# Altium PCB 388D_Control_v1_PCB1_harry.PcbDoc (part 2 of 5)
Units mil, origin at the board's own origin, x right, y up, seen from the top; angles counter-clockwise.
Board outline 4800 x 4000 mil, 6 copper layers (Top Layer, Singal Layer 2, Signal layer 3, Signal Layer 4, Signal Layer 5, Bottom Layer), stack 32.7 mil thick; 431 components, 469 nets, 2000 pads, 719 vias.
Unrouted connection lines stored in the file: 971.
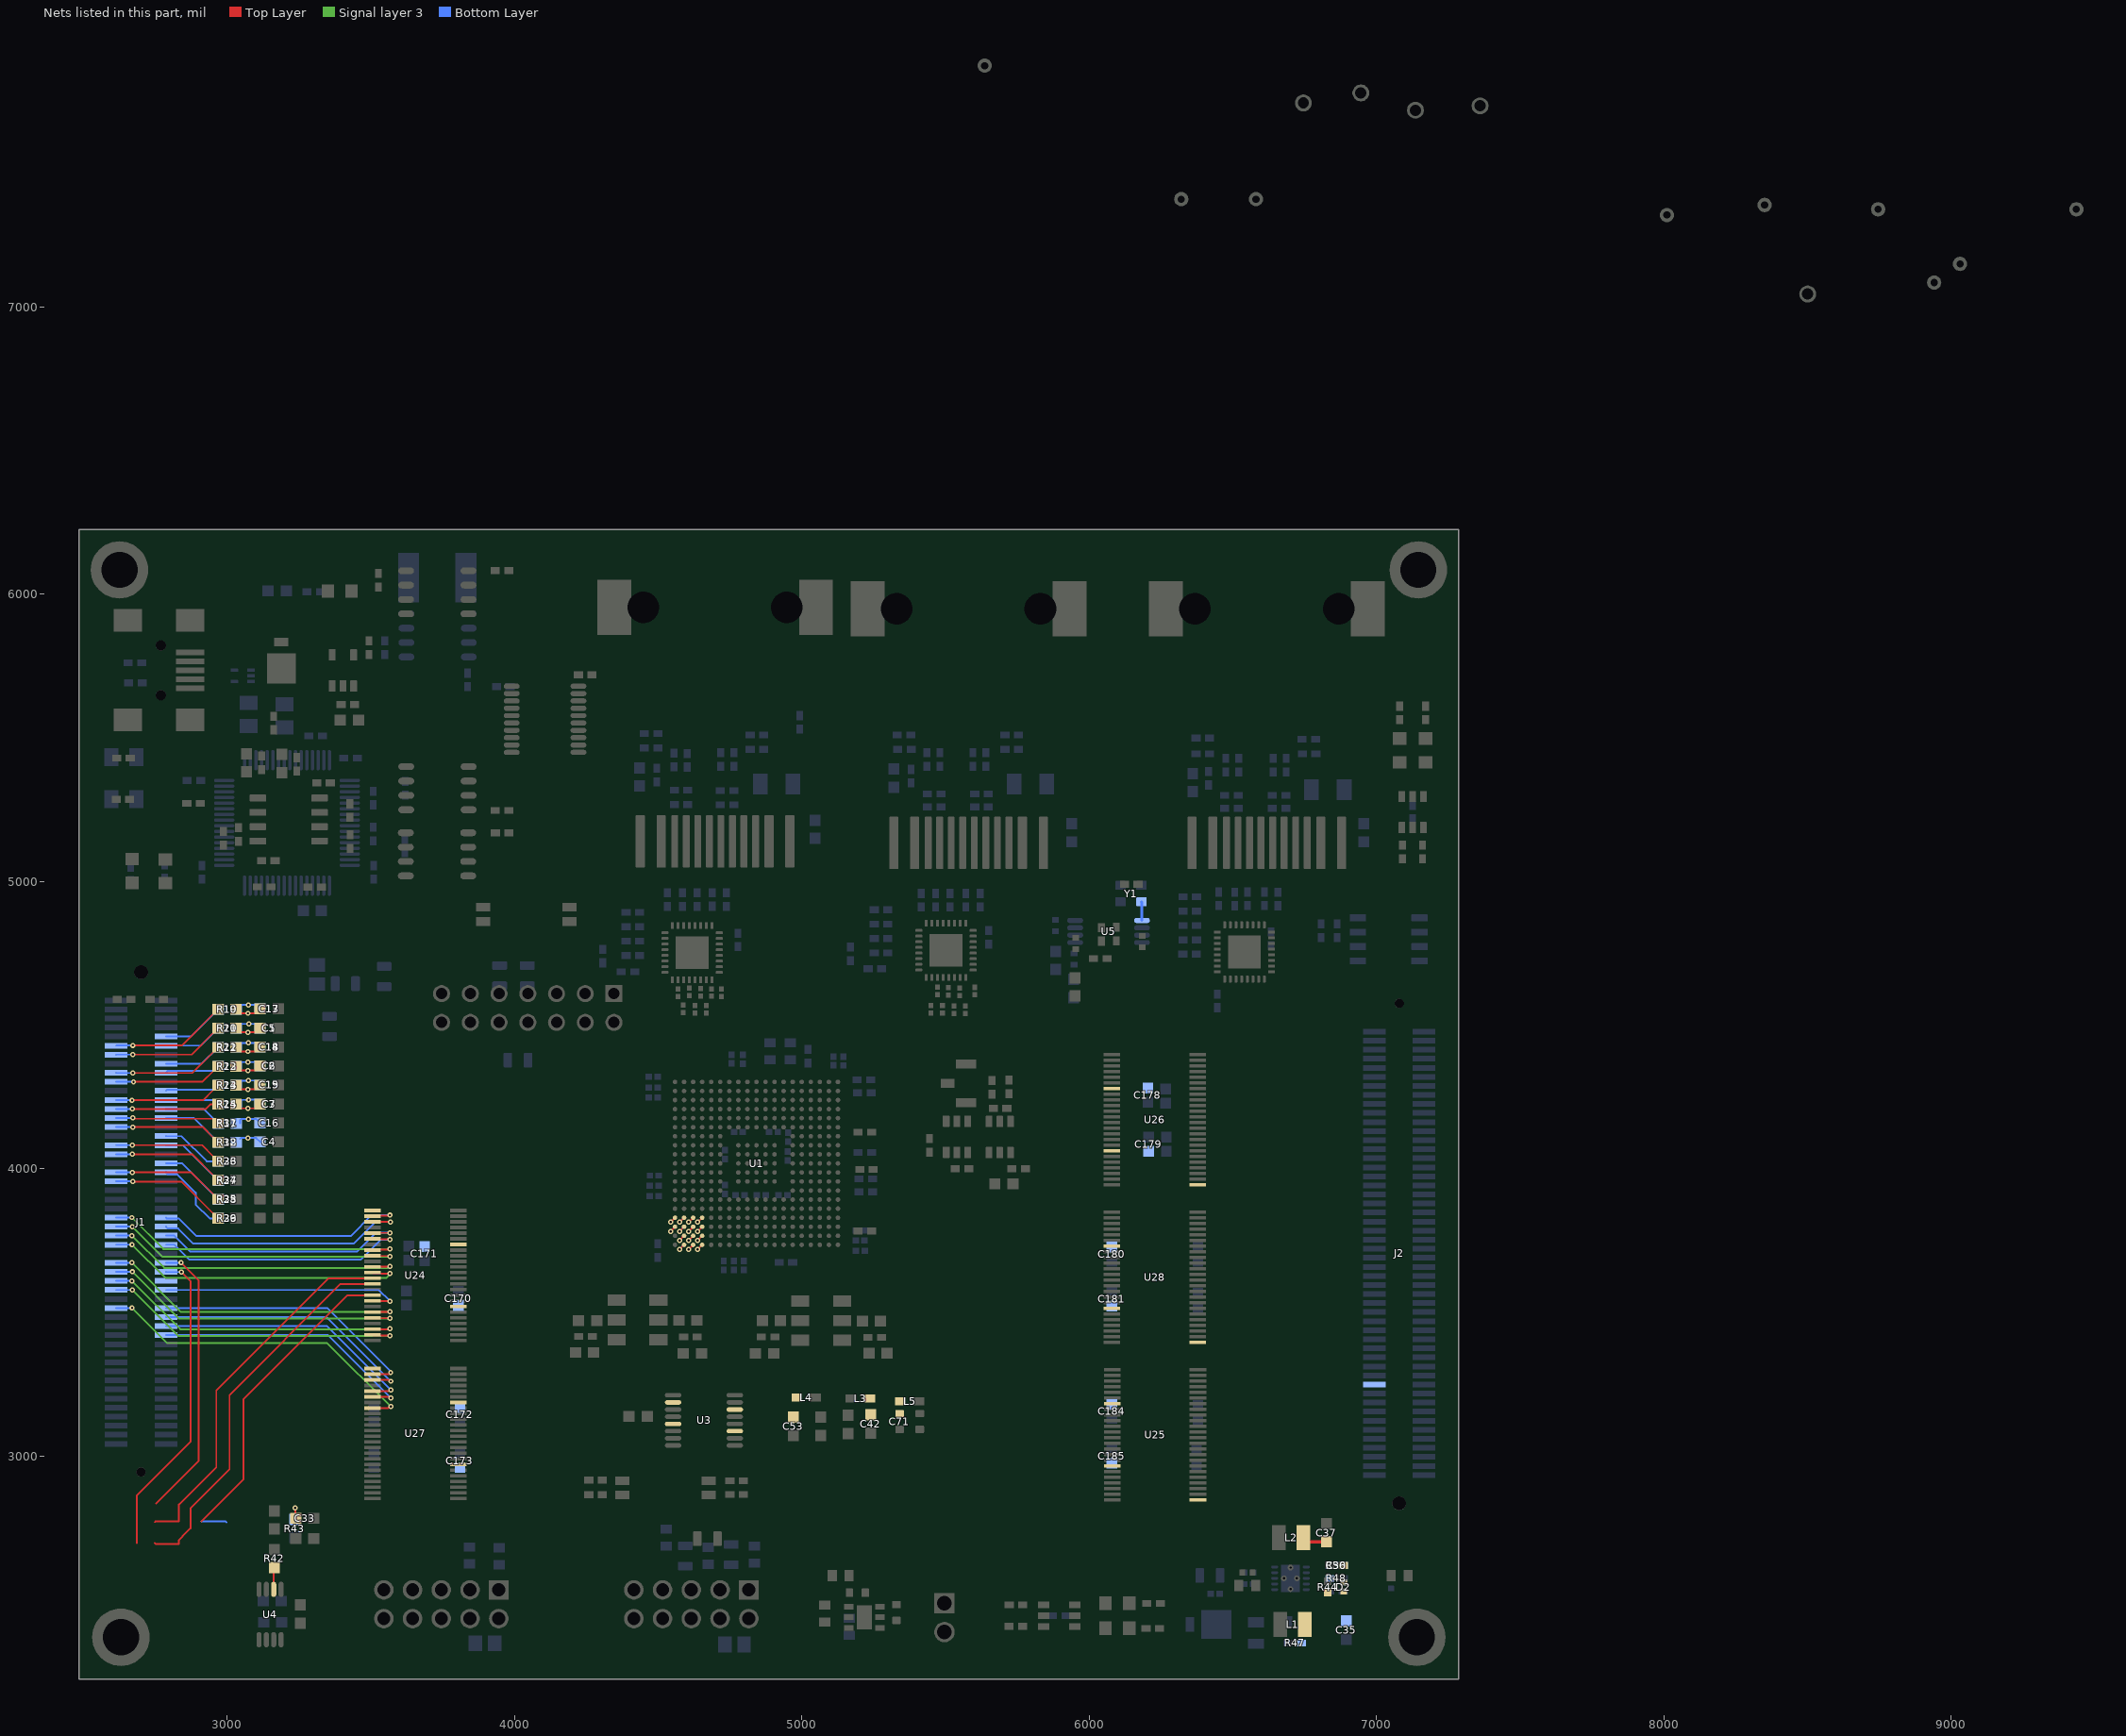
[diagram p3: the nets of this part, all layers, seen from the top]

## Footprints (in the part's own frame and the unit in brackets; to place one, negate y for a bottom-side part, rotate by r counter-clockwise, add the part's x,y. Pads: shape width x height; smd on the part's side, far side on the other; paste and mask are expansions set on the pad) (continued)
SULLINS_SBH11-PBPC-D07-ST-BK [mm]
  rect 1.508x1.508 / inner round 1.508 / far side rect 1.508x1.508 hole 1: 1(-7.62,-1.27)
  round 1.508 hole 1: 2(-7.62,1.27) 3(-5.08,-1.27) 4(-5.08,1.27) 5(-2.54,-1.27) 6(-2.54,1.27) 7(0,-1.27) 8(0,1.27) 9(2.54,-1.27) 10(2.54,1.27) 11(5.08,-1.27) 12(5.08,1.27) 13(7.62,-1.27) 14(7.62,1.27)
  silkscreen extent -12.64,-5.5 12.64,4.7, body extent -12.64,-4.39 12.64,4.7, height 9.09
SW_218-2LP [mm]
  rect 1.27x0.76 smd: 1(-3.81,0.635) 2(-3.81,-0.635) 3(3.81,-0.635) 4(3.81,0.635)
  silkscreen extent -2.9,-1.86 2.9,2.09, body extent -4.22,-1.86 4.22,1.85, height 2.62
SW_B3U-1100P [mm]
  rect 0.8x1.8 smd: 1(-1.7,0) 2(1.7,0)
  rect 0.8x1.2 smd: 3(0,1.65)
  silkscreen extent -2.82,-1.25 1.5,1.25, body extent -2,-1.25 2,1.9, height 1.6
SW_CAS-D20TA [mm]
  rect 1.6x1 smd: 1(-1.85,1.75) 2(-1.85,0) 3(-1.85,-1.75) 4(1.85,1.75) 5(1.85,0) 6(1.85,-1.75)
  silkscreen extent -1.95,-2.7 1.95,2.9, body extent -2.1,-2.7 2.1,2.7, height 2.5
TECO-640456-2_V [mm] "HDR, 2-Leads, Body 5.715x5.08mm, Pitch 2.54mm"
  rect 1.8x1.8 hole 1.3: 1(1.27,0)
  round 1.8 hole 1.3: 2(-1.27,0)
  silkscreen extent -2.54,-2.54 3.26,3.17, body extent -2.54,-2.67 2.54,3.17, height 9.4
TP_50MIL-25MILHOLE [mil]
  round 50 hole 25: 1(0,0)
WL-SMCW_Blue_0805 [mm]
  rect 1.1x1.2 smd: 1(-1.05,0) 2(1.05,0)
  silkscreen extent -2.4,-1.1 1.5,1.1, body extent -1,-0.62 1,0.63, height 0.7
WL-SMCW_Green_0805 [mm]
  rect 1.1x1.2 smd: 1(-1.05,0) 2(1.05,0)
  silkscreen extent -2.4,-1.1 1.5,1.1, body extent -1,-0.62 1,0.63, height 0.7
WL-SMCW_RED_0805 [mm]
  rect 1.1x1.2 smd: 1(-1.05,0) 2(1.05,0)
  silkscreen extent -2.4,-1.1 1.5,1.1, body extent -1,-0.62 1,0.63, height 0.7
Wurth_7498010210A [mm]
  rrect12% 4.6x0.81 smd: 1(-20.69,6.61) 2(-20.69,4.77) 11(-20.69,-4.77) 12(-20.69,-6.61)
  rrect16% 4.6x0.61 smd: 3(-20.69,3.57) 4(-20.69,2.55) 5(-20.69,1.53) 6(-20.69,0.51) 7(-20.69,-0.51) 8(-20.69,-1.53) 9(-20.69,-2.55) 10(-20.69,-3.57)
  rrect3% 4.9x3 smd: 13(0,8.92) 14(0,-8.92)
  round 2.5 hole 2.8 unplated mask+0.102: ALIGN1(0,6.35) ALIGN2(0,-6.35)
  body extent -21.42,-9.65 5.43,9.65, height 15.22
Wurth_65100516121 [mm]
  rect 0.5x2.5 smd: 1(-1.6,8.5) 2(-0.8,8.5) 3(0,8.5) 4(0.8,8.5) 5(1.6,8.5)
  rect 2x2.5 smd: 6(-4.4,8.5) 7(4.4,8.5) 8(-4.4,3) 9(4.4,3)
  round 0.9 hole 0.9 unplated mask+0: ALIGN1(-2.2,5.9) ALIGN2(2.2,5.9)
  silkscreen extent -3.85,0.15 3.85,9.6, body extent -4.8,0 4.8,9.25, height 3.91
ZWT0337A-IPC_B [mm] "for F28388DZWTS"
  round 0.4 smd paste+0 mask+0: A1(-7.2,7.2) A2(-6.4,7.2) A3(-5.6,7.2) A4(-4.8,7.2) A5(-4,7.2) A6(-3.2,7.2) A7(-2.4,7.2) A8(-1.6,7.2) A9(-0.8,7.2) A10(0,7.2) A11(0.8,7.2) A12(1.6,7.2) A13(2.4,7.2) A14(3.2,7.2) A15(4,7.2) A16(4.8,7.2) A17(5.6,7.2) A18(6.4,7.2) A19(7.2,7.2) B1(-7.2,6.4) B2(-6.4,6.4) B3(-5.6,6.4) B4(-4.8,6.4) B5(-4,6.4) B6(-3.2,6.4) B7(-2.4,6.4) B8(-1.6,6.4) B9(-0.8,6.4) B10(0,6.4) B11(0.8,6.4) B12(1.6,6.4) B13(2.4,6.4) B14(3.2,6.4) B15(4,6.4) B16(4.8,6.4) B17(5.6,6.4) B18(6.4,6.4) B19(7.2,6.4) C1(-7.2,5.6) C2(-6.4,5.6) C3(-5.6,5.6) C4(-4.8,5.6) C5(-4,5.6) C6(-3.2,5.6) C7(-2.4,5.6) C8(-1.6,5.6) C9(-0.8,5.6) C10(0,5.6) C11(0.8,5.6) C12(1.6,5.6) C13(2.4,5.6) C14(3.2,5.6) C15(4,5.6) C16(4.8,5.6) C17(5.6,5.6) C18(6.4,5.6) C19(7.2,5.6) D1(-7.2,4.8) D2(-6.4,4.8) D3(-5.6,4.8) D4(-4.8,4.8) D5(-4,4.8) D6(-3.2,4.8) D7(-2.4,4.8) D8(-1.6,4.8) D9(-0.8,4.8) D10(0,4.8) D11(0.8,4.8) D12(1.6,4.8) D13(2.4,4.8) D14(3.2,4.8) D15(4,4.8) D16(4.8,4.8) D17(5.6,4.8) D18(6.4,4.8) D19(7.2,4.8) E1(-7.2,4) E2(-6.4,4) E3(-5.6,4) E4(-4.8,4) E5(-4,4) E6(-3.2,4) E7(-2.4,4) E8(-1.6,4) E9(-0.8,4) E10(0,4) E11(0.8,4) E12(1.6,4) E13(2.4,4) E14(3.2,4) E15(4,4) E16(4.8,4) E17(5.6,4) E18(6.4,4) E19(7.2,4) F1(-7.2,3.2) F2(-6.4,3.2) F3(-5.6,3.2) F4(-4.8,3.2) F5(-4,3.2) F6(-3.2,3.2) F7(-2.4,3.2) F8(-1.6,3.2) F9(-0.8,3.2) F10(0,3.2) F11(0.8,3.2) F12(1.6,3.2) F13(2.4,3.2) F14(3.2,3.2) F15(4,3.2) F16(4.8,3.2) F17(5.6,3.2) F18(6.4,3.2) F19(7.2,3.2) G1(-7.2,2.4) G2(-6.4,2.4) G3(-5.6,2.4) G4(-4.8,2.4) G5(-4,2.4) G6(-3.2,2.4) G14(3.2,2.4) G15(4,2.4) G16(4.8,2.4) G17(5.6,2.4) G18(6.4,2.4) G19(7.2,2.4) H1(-7.2,1.6) H2(-6.4,1.6) H3(-5.6,1.6) H4(-4.8,1.6) H5(-4,1.6) H6(-3.2,1.6) H8(-1.6,1.6) H9(-0.8,1.6) H10(0,1.6) H11(0.8,1.6) H12(1.6,1.6) H14(3.2,1.6) H15(4,1.6) H16(4.8,1.6) H17(5.6,1.6) H18(6.4,1.6) H19(7.2,1.6) J1(-7.2,0.8) J2(-6.4,0.8) J3(-5.6,0.8) J4(-4.8,0.8) J5(-4,0.8) J6(-3.2,0.8) J8(-1.6,0.8) J9(-0.8,0.8) J10(0,0.8) J11(0.8,0.8) J12(1.6,0.8) J14(3.2,0.8) J15(4,0.8) J16(4.8,0.8) J17(5.6,0.8) J18(6.4,0.8) J19(7.2,0.8) K1(-7.2,0) K2(-6.4,0) K3(-5.6,0) K4(-4.8,0) K5(-4,0) K6(-3.2,0) K8(-1.6,0) K9(-0.8,0) K10(0,0) K11(0.8,0) K12(1.6,0) K14(3.2,0) K15(4,0) K16(4.8,0) K17(5.6,0) K18(6.4,0) K19(7.2,0) L1(-7.2,-0.8) L2(-6.4,-0.8) L3(-5.6,-0.8) L4(-4.8,-0.8) L5(-4,-0.8) L6(-3.2,-0.8) L8(-1.6,-0.8) L9(-0.8,-0.8) L10(0,-0.8) L11(0.8,-0.8) L12(1.6,-0.8) L14(3.2,-0.8) L15(4,-0.8) L16(4.8,-0.8) L17(5.6,-0.8) L18(6.4,-0.8) L19(7.2,-0.8) M1(-7.2,-1.6) M2(-6.4,-1.6) M3(-5.6,-1.6) M4(-4.8,-1.6) M5(-4,-1.6) M6(-3.2,-1.6) M8(-1.6,-1.6) M9(-0.8,-1.6) M10(0,-1.6) M11(0.8,-1.6) M12(1.6,-1.6) M14(3.2,-1.6) M15(4,-1.6) M16(4.8,-1.6) M17(5.6,-1.6) M18(6.4,-1.6) M19(7.2,-1.6) N1(-7.2,-2.4) N2(-6.4,-2.4) N3(-5.6,-2.4) N4(-4.8,-2.4) N5(-4,-2.4) N6(-3.2,-2.4) N14(3.2,-2.4) N15(4,-2.4) N16(4.8,-2.4) N17(5.6,-2.4) N18(6.4,-2.4) N19(7.2,-2.4) P1(-7.2,-3.2) P2(-6.4,-3.2) P3(-5.6,-3.2) P4(-4.8,-3.2) P5(-4,-3.2) P6(-3.2,-3.2) P7(-2.4,-3.2) P8(-1.6,-3.2) P9(-0.8,-3.2) P10(0,-3.2) P11(0.8,-3.2) P12(1.6,-3.2) P13(2.4,-3.2) P14(3.2,-3.2) P15(4,-3.2) P16(4.8,-3.2) P17(5.6,-3.2) P18(6.4,-3.2) P19(7.2,-3.2) R1(-7.2,-4) R2(-6.4,-4) R3(-5.6,-4) R4(-4.8,-4) R5(-4,-4) R6(-3.2,-4) R7(-2.4,-4) R8(-1.6,-4) R9(-0.8,-4) R10(0,-4) R11(0.8,-4) R12(1.6,-4) R13(2.4,-4) R14(3.2,-4) R15(4,-4) R16(4.8,-4) R17(5.6,-4) R18(6.4,-4) R19(7.2,-4) T1(-7.2,-4.8) T2(-6.4,-4.8) T3(-5.6,-4.8) T4(-4.8,-4.8) T5(-4,-4.8) T6(-3.2,-4.8) T7(-2.4,-4.8) T8(-1.6,-4.8) T9(-0.8,-4.8) T10(0,-4.8) T11(0.8,-4.8) T12(1.6,-4.8) T13(2.4,-4.8) T14(3.2,-4.8) T15(4,-4.8) T16(4.8,-4.8) T17(5.6,-4.8) T18(6.4,-4.8) T19(7.2,-4.8) U1(-7.2,-5.6) U2(-6.4,-5.6) U3(-5.6,-5.6) U4(-4.8,-5.6) U5(-4,-5.6) U6(-3.2,-5.6) U7(-2.4,-5.6) U8(-1.6,-5.6) U9(-0.8,-5.6) U10(0,-5.6) U11(0.8,-5.6) U12(1.6,-5.6) U13(2.4,-5.6) U14(3.2,-5.6) U15(4,-5.6) U16(4.8,-5.6) U17(5.6,-5.6) U18(6.4,-5.6) U19(7.2,-5.6) V1(-7.2,-6.4) V2(-6.4,-6.4) V3(-5.6,-6.4) V4(-4.8,-6.4) V5(-4,-6.4) V6(-3.2,-6.4) V7(-2.4,-6.4) V8(-1.6,-6.4) V9(-0.8,-6.4) V10(0,-6.4) V11(0.8,-6.4) V12(1.6,-6.4) V13(2.4,-6.4) V14(3.2,-6.4) V15(4,-6.4) V16(4.8,-6.4) V17(5.6,-6.4) V18(6.4,-6.4) V19(7.2,-6.4) W1(-7.2,-7.2) W2(-6.4,-7.2) W3(-5.6,-7.2) W4(-4.8,-7.2) W5(-4,-7.2) W6(-3.2,-7.2) W7(-2.4,-7.2) W8(-1.6,-7.2) W9(-0.8,-7.2) W10(0,-7.2) W11(0.8,-7.2) W12(1.6,-7.2) W13(2.4,-7.2) W14(3.2,-7.2) W15(4,-7.2) W16(4.8,-7.2) W17(5.6,-7.2) W18(6.4,-7.2) W19(7.2,-7.2)
  silkscreen extent -8.62,-8 8,8

## Part data
C1 C2 C3 C4 C5 C6 C7 C8 C9 C10 C11 C12 C13 C14 C15 C16 C17 C18 C19 C20 C21 C22 C23 C24: library part CMP-0006920-4, "CAP, CERM, 330 pF, 50 V, +/- 5%, C0G/NP0, 0603", Cap_Case=0603, Manufacturer=Kemet, Supplier Part Number 1=399-1068-1-ND, TempCo=C0G/NP0, Tolerance_%=5%, Value1=Unknown, Value2=50V, ValueDisplayed=330pF, AEC Category=Q200, AEC Qualified=?, Cap_F=330pF, ComponentLink1Description="Datasheet link", ComponentLink1URL=http://www.kemet.com/kemet/web/homepage/kechome.nsf/vapubfiles/F3102_Y5V.pdf/$file/F3102_Y5V.pdf, CompType=Capacitor, LatestRevisionDate=2017-03-09, MountType=SMT, PackageReference=0603, PartNumber=C0603C331J5GACTU, Polarized=N, Published=2008-06-19, Publisher="Texas Instruments", RoHS=Y, SizeArea_mm2=1.28, SizeAreaWB_mm2=4.68, SizeX_mm=1.6, SizeY_mm=0.8, SizeZ_mm=1, Supplier 1=Digi-Key, Supplier 2=Mouser, Supplier 3=Farnell, Supplier Part Number 2=80-C0603C331J5G, Supplier Part Number 3=1414634, TaMax_C=125°C, TaMin_C=-55°C, Technology=Ceramic, U/M=EA
C25 C30: library part CMP-0006862-5, "CAP, CERM, 0.1 uF, 10 V, +/- 10%, X7R, 0603", Cap_Case=0603, Manufacturer=Kemet, Supplier Part Number 1=399-1095-1-ND, TempCo=X7R, Tolerance_%=10%, Value1=Unknown, Value2=10V, ValueDisplayed=0.1uF, AEC Category=Q200, AEC Qualified=?, Cap_F=100nF, ComponentLink1Description="Datasheet link", ComponentLink1URL=http://www.kemet.com/kemet/web/homepage/kechome.nsf/vapubfiles/F3102_Y5V.pdf/$file/F3102_Y5V.pdf, CompType=Capacitor, LatestRevisionDate=2017-03-09, MountType=SMT, PackageReference=0603, PartNumber=C0603C104K8RACTU, Polarized=N, Published=2008-06-19, Publisher="Texas Instruments", RoHS=Y, SizeArea_mm2=1.28, SizeAreaWB_mm2=4.68, SizeX_mm=1.6, SizeY_mm=0.8, SizeZ_mm=1, Supplier 1=Digi-Key, Supplier 2=Mouser, Supplier 3=Farnell, Supplier Part Number 2=80-C0603C104K8R, Supplier Part Number 3=1640032, TaMax_C=125°C, TaMin_C=-55°C, Technology=Ceramic, U/M=EA
C26 C27 C28 C29: library part CMP-0007324-5, "CAP, CERM, 22 uF, 10 V, +/- 20%, X5R, 0603", Cap_Case=0603, Manufacturer=MuRata, Supplier Part Number 1=490-10476-1-ND, TempCo=X5R, Tolerance_%=20%, Value1=Unknown, Value2=10V, ValueDisplayed=22uF, AEC Category=Q200, AEC Qualified=?, Cap_F=22µF, ComponentLink1Description="Datasheet link", ComponentLink1URL=http://psearch.murata.com/capacitor/product/GRM188R61A226ME15%23.pdf, CompType=Capacitor, LatestRevisionDate=2017-03-09, MountType=SMT, PackageReference=0603, PartNumber=GRM188R61A226ME15D, Polarized=N, Published=2008-06-19, Publisher="Texas Instruments", RoHS=Y, SizeArea_mm2=1.28, SizeAreaWB_mm2=4.68, SizeX_mm=1.6, SizeY_mm=0.8, SizeZ_mm=1, Supplier 1=Digi-Key, Supplier 2=Newark, Supplier 3=Mouser, Supplier Part Number 2=68X2786, Supplier Part Number 3=81-GRM188R61A226ME5D, TaMax_C=85°C, TaMin_C=-55°C, Technology=Ceramic, U/M=EA
C31: library part CMP-0006907-5, "CAP, CERM, 2.2 uF, 6.3 V, +/- 10%, X5R, 0603", Cap_Case=0603, Manufacturer=Kemet, Supplier Part Number 1=399-3362-1-ND, TempCo=X5R, Tolerance_%=10%, Value1=Unknown, Value2=6.3V, ValueDisplayed=2.2uF, AEC Category=Q200, AEC Qualified=?, Cap_F=2.2µF, ComponentLink1Description="Datasheet link", ComponentLink1URL=http://www.kemet.com/kemet/web/homepage/kechome.nsf/vapubfiles/F3102_Y5V.pdf/$file/F3102_Y5V.pdf, CompType=Capacitor, LatestRevisionDate=2017-03-09, MountType=SMT, PackageReference=0603, PartNumber=C0603C225K9PACTU, Polarized=N, Published=2008-06-19, Publisher="Texas Instruments", RoHS=Y, SizeArea_mm2=1.28, SizeAreaWB_mm2=4.68, SizeX_mm=1.6, SizeY_mm=0.8, SizeZ_mm=1, Supplier 1=Digi-Key, Supplier 2=Mouser, Supplier 3=Farnell, Supplier Part Number 2=80-C0603C225K9P, Supplier Part Number 3=1288257, TaMax_C=85°C, TaMin_C=-55°C, Technology=Ceramic, U/M=EA
C32 C33 C34: library part CMP-0006871-4, "CAP, CERM, 1 uF, 6.3 V, +80/-20%, Y5V, 0603", Cap_Case=0603, Manufacturer=Kemet, Supplier Part Number 1=399-3217-1-ND, TempCo=Y5V, Tolerance_%=80%, Value1=Unknown, Value2=6.3V, ValueDisplayed=1uF, AEC Category=Q200, AEC Qualified=?, Cap_F=1µF, ComponentLink1Description="Datasheet link", ComponentLink1URL=http://www.kemet.com/kemet/web/homepage/kechome.nsf/vapubfiles/F3102_Y5V.pdf/$file/F3102_Y5V.pdf, CompType=Capacitor, LatestRevisionDate=2017-03-09, MountType=SMT, PackageReference=0603, PartNumber=C0603C105Z9VACTU, Polarized=N, Published=2008-06-19, Publisher="Texas Instruments", RoHS=Y, SizeArea_mm2=1.28, SizeAreaWB_mm2=4.68, SizeX_mm=1.6, SizeY_mm=0.8, SizeZ_mm=1, Supplier 1=Digi-Key, Supplier 2=Mouser, Supplier 3=Farnell, Supplier Part Number 2=80-C0603C105Z9V, Supplier Part Number 3=1515067, TaMax_C=85°C, TaMin_C=-30°C, Technology=Ceramic, U/M=EA
C35 C37: library part CMP-0007324-5, "CAP, CERM, 22 uF, 10 V, +/- 20%, X5R, 0603", Cap_Case=0603, Manufacturer=MuRata, Supplier Part Number 1=490-10476-1-ND, TempCo=X5R, Tolerance_%=20%, Value1=Unknown, Value2=10V, ValueDisplayed=22uF/C0603, AEC Category=Q200, AEC Qualified=?, Cap_F=22µF, ComponentLink1Description="Datasheet link", ComponentLink1URL=http://psearch.murata.com/capacitor/product/GRM188R61A226ME15%23.pdf, CompType=Capacitor, LatestRevisionDate=2017-03-09, MountType=SMT, PackageReference=0603, PartNumber=GRM188R61A226ME15D, Polarized=N, Published=2008-06-19, Publisher="Texas Instruments", RoHS=Y, SizeArea_mm2=1.28, SizeAreaWB_mm2=4.68, SizeX_mm=1.6, SizeY_mm=0.8, SizeZ_mm=1, Supplier 1=Digi-Key, Supplier 2=Newark, Supplier 3=Mouser, Supplier Part Number 2=68X2786, Supplier Part Number 3=81-GRM188R61A226ME5D, TaMax_C=85°C, TaMin_C=-55°C, Technology=Ceramic, U/M=EA
C36: library part CMP-0006213-2, "CAP, CERM, 33 pF, 25 V, +/- 5%, C0G/NP0, 0402", Cap_Case=0402, Manufacturer="Wurth Elektronik", Supplier Part Number 1=710-885012005043, TempCo=C0G/NP0, Tolerance_%=5%, Value1=Unknown, Value2=25V, ValueDisplayed=33pF/C0402, AEC Category=Q200, AEC Grade=N/A, AEC Qualified=N, Cap_F=33pF, ComponentLink1Description="Datasheet link", ComponentLink1URL=http://katalog.we-online.de/pbs/datasheet/885012005043.pdf, CompType=Capacitor, LatestRevisionDate=2017-03-09, MountType=SMT, PackageReference=0402, PartNumber=885012005043, Polarized=N, Published=2008-06-19, Publisher="Texas Instruments", RoHS=Y, SizeArea_mm2=0.5, SizeAreaWB_mm2=3, SizeX_mm=1, SizeY_mm=0.5, SizeZ_mm=0.6, Supplier 1=Mouser, TaMax_C=125°C, TaMin_C=-55°C, Technology=Ceramic, U/M=EA, VDC_V=25V
C38 C40 C41 C44 C45 C46 C47 C48 C49 C50 C51 C52 C55 C56 C57 C58 C59 C60 C61 C62 C63 C64 C65 C66 C67 C68 C69 C70: library part CMP-001-00001-6, "Chip Capacitor, 0.1 uF, +/- 5%, 16 V, 0402 (1005 Metric)", Capacitor Type=Ceramic, Case/Package=0402, Max Operating Temperature=125°C, Min Operating Temperature=-55°C, Tolerance=5%, Voltage Rating=16V, Mounting Technology=SM, Pins=2, RoHS Compliant=True
C39: library part CMP-001-00081-4, "Chip Capacitor, 22µF +/-40%, 16V, 0805, Thickness 1.45 mm", Case/Package=0805, Max Operating Temperature=85°C, Min Operating Temperature=-55°C, Tolerance=5%, Voltage Rating=16V, Mounting Technology=SMT, Pins=2
C42 C43 C53 C54: library part CMP-0006906-5, "CAP, CERM, 2.2 uF, 10 V, +/- 10%, X5R, 0603", Cap_Case=0603, Manufacturer=Kemet, Supplier Part Number 1=399-4911-1-ND, TempCo=X5R, Tolerance_%=10%, Value1=Unknown, Value2=10V, ValueDisplayed=2.2uF/C0603, AEC Category=Q200, AEC Qualified=?, Cap_F=2.2µF, ComponentLink1Description="Datasheet link", ComponentLink1URL=http://www.kemet.com/kemet/web/homepage/kechome.nsf/vapubfiles/F3102_Y5V.pdf/$file/F3102_Y5V.pdf, CompType=Capacitor, LatestRevisionDate=2017-03-09, MountType=SMT, PackageReference=0603, PartNumber=C0603C225K8PACTU, Polarized=N, Published=2008-06-19, Publisher="Texas Instruments", RoHS=Y, SizeArea_mm2=1.28, SizeAreaWB_mm2=4.68, SizeX_mm=1.6, SizeY_mm=0.8, SizeZ_mm=1, Supplier 1=Digi-Key, Supplier 2=Mouser, Supplier 3=Farnell, Supplier Part Number 2=80-C0603C225K8P, Supplier Part Number 3=1108322, TaMax_C=85°C, TaMin_C=-55°C, Technology=Ceramic, U/M=EA
C71 C72: library part CMP-001-00075-4, "Chip Capacitor, 10µF +/-20%, 10V, 0603, Thickness 1 mm", Case/Package=0603, Max Operating Temperature=85°C, Min Operating Temperature=-55°C, Tolerance=10%, Voltage Rating=10V, Mounting Technology=SMT, Pins=2
C73 C75 C77 C78 C108 C126 C132 C137 C138 C139 C140 C141 C142 C143 C145 C147 C151 C152 C153 C154 C155 C156 C157 C158 C159: library part CMP-0006343-2, "CAP, CERM, 0.1 uF, 10 V, +/- 10%, X7R, 0402", Cap_Case=0402, Manufacturer="Samsung Electro-Mechanics", TempCo=X7R, Tolerance_%=10%, Value1=Unknown, Value2=10V, ValueDisplayed=0.1uF, AEC Category=Q200, AEC Grade=N/A, AEC Qualified=N, Cap_F=100nF, ComponentLink1Description="Datasheet link", ComponentLink1URL=http://www.samsungsem.com/kr/front/downloadcms.do?path=/kr/support/product-search/mlcc/__icsFiles/afieldfile/2014/11/05&fileName=S_CL05B104KP5NNNC.pdf, CompType=Capacitor, LatestRevisionDate=2017-03-09, MountType=SMT, PackageReference=0402, PartNumber=CL05B104KP5NNNC, Polarized=N, Published=2008-06-19, Publisher="Texas Instruments", RoHS=Y, SizeArea_mm2=0.5, SizeAreaWB_mm2=3, SizeX_mm=1, SizeY_mm=0.5, SizeZ_mm=0.6, TaMax_C=125°C, TaMin_C=-55°C, Technology=Ceramic, U/M=EA, VDC_V=10V
C74 C76: library part CMP-0006236-2, "CAP, CERM, 0.01 uF, 50 V, +/- 5%, X7R, 0402", Cap_Case=0402, Manufacturer=Kemet, Supplier Part Number 1=399-7758-1-ND, TempCo=X7R, Tolerance_%=5%, Value1=Unknown, Value2=50V, ValueDisplayed=0.01uF, AEC Category=Q200, AEC Qualified=?, Cap_F=10nF, ComponentLink1Description="Datasheet link", ComponentLink1URL=http://www.kemet.com/Lists/ProductCatalog/Attachments/53/KEM_C1002_X7R_SMD.pdf, CompType=Capacitor, LatestRevisionDate=2017-03-09, MountType=SMT, PackageReference=0402, PartNumber=C0402C103J5RACTU, Polarized=N, Published=2008-06-19, Publisher="Texas Instruments", RoHS=Y, SizeArea_mm2=0.5, SizeAreaWB_mm2=3, SizeX_mm=1, SizeY_mm=0.5, SizeZ_mm=0.6, Supplier 1=Digi-Key, Supplier 2=Newark, Supplier 3=Mouser, Supplier Part Number 2=57J0044, Supplier Part Number 3=80-C0402C103J5R, TaMax_C=125°C, TaMin_C=-55°C, Technology=Ceramic, U/M=EA
C79 C86 C96 C103 C114 C121: library part CMP-0006340-2, "CAP, CERM, 10 uF, 6.3 V, +/- 20%, X5R, 0402", Cap_Case=0402, Manufacturer="Samsung Electro-Mechanics", TempCo=X5R, Tolerance_%=20%, Value1=Unknown, Value2=6.3V, ValueDisplayed=10uF, AEC Category=Q200, AEC Qualified=?, Cap_F=10µF, ComponentLink1Description="Datasheet link", ComponentLink1URL=http://www.samsungsem.com/servlet/DownloadServlet?dir=partnumber&num=&fileName=CL05A106MQ5NUNC.pdf, CompType=Capacitor, LatestRevisionDate=2017-03-09, MountType=SMT, PackageReference=0402, PartNumber=CL05A106MQ5NUNC, Polarized=N, Published=2008-06-19, Publisher="Texas Instruments", RoHS=Y, SizeArea_mm2=0.5, SizeAreaWB_mm2=3, SizeX_mm=1, SizeY_mm=0.5, SizeZ_mm=0.6, TaMax_C=85°C, TaMin_C=-55°C, Technology=Ceramic, U/M=EA
C80 C85 C88 C89 C91 C94 C97 C102 C105 C106 C109 C112 C115 C120 C123 C124 C127 C130: library part CMP-0006347-2, "CAP, CERM, 1 uF, 16 V, +/- 10%, X5R, 0402", Cap_Case=0402, Manufacturer="Taiyo Yuden", Supplier Part Number 1=587-3709-2-ND, TempCo=X5R, Tolerance_%=10%, Value1=Unknown, Value2=16V, ValueDisplayed=1uF, AEC Category=Q200, AEC Qualified=?, Cap_F=1µF, ComponentLink1Description="Datasheet link", ComponentLink1URL=http://www.yuden.co.jp/ut/product/category/capacitor/EMK105BJ105KVHF_SS.pdf, CompType=Capacitor, LatestRevisionDate=2017-03-09, MountType=SMT, PackageReference=0402, PartNumber=EMK105BJ105KVHF, Polarized=N, Published=2008-06-19, Publisher="Texas Instruments", RoHS=Y, SizeArea_mm2=0.5, SizeAreaWB_mm2=3, SizeX_mm=1, SizeY_mm=0.5, SizeZ_mm=0.6, Supplier 1=Digi-Key, Supplier 2=Newark, Supplier Part Number 2=68X1293, TaMax_C=85°C, TaMin_C=-55°C, Technology=Ceramic, U/M=EA
C81 C84 C87 C90 C92 C93 C98 C101 C104 C107 C110 C111 C116 C119 C122 C125 C128 C129: library part CMP-0064930-2, "CAP, CERM, 0.1 uF, 10 V,+/- 10%, X5R, 0402", Cap_Case=0402, Manufacturer="Taiyo Yuden", Supplier Part Number 1=587-1227-1-ND, TempCo=X5R, Tolerance_%=10%, Value1=Unknown, Value2=10V, ValueDisplayed=0.1uF, AEC Category=Q200, AEC Grade=N/A, AEC Qualified=N, Cap_F=100nF, ComponentLink1Description="Datasheet link", ComponentLink1URL=http://ds.yuden.co.jp/TYCOMPAS/ut/detail.do?productNo=LMK105BJ104KV-F&fileName=LMK105BJ104KV-F_SS&mode=specSheetDownload, CompType=Capacitor, LatestRevisionDate=2017-06-05, MountType=SMT, PackageReference=0402, PartNumber=LMK105BJ104KV-F, Polarized=N, Published=2008-06-19, Publisher="Texas Instruments", RoHS=Y, SizeArea_mm2=0.5, SizeAreaWB_mm2=3, SizeX_mm=1, SizeY_mm=0.5, SizeZ_mm=0.6, Supplier 1=Digi-Key, Supplier 2=Newark, Supplier 3=Mouser, Supplier Part Number 2=86H5618, Supplier Part Number 3=963-LMK105BJ104KV-F, TaMax_C=85°C, TaMin_C=-55°C, Technology=Ceramic, U/M=EA, VDC_V=10V
C82 C83 C99 C100 C117 C118: library part CMP-0006227-2, "CAP, CERM, 0.01 uF, 16 V, +/- 10%, X7R, 0402", Cap_Case=0402, Manufacturer="Wurth Elektronik", Supplier Part Number 1=710-885012205031, TempCo=X7R, Tolerance_%=10%, Value1=Unknown, Value2=16V, ValueDisplayed=0.01uF, AEC Category=Q200, AEC Grade=N/A, AEC Qualified=N, Cap_F=10nF, ComponentLink1Description="Datasheet link", ComponentLink1URL=http://katalog.we-online.de/pbs/datasheet/885012205031.pdf, CompType=Capacitor, LatestRevisionDate=2017-03-09, MountType=SMT, PackageReference=0402, PartNumber=885012205031, Polarized=N, Published=2008-06-19, Publisher="Texas Instruments", RoHS=Y, SizeArea_mm2=0.5, SizeAreaWB_mm2=3, SizeX_mm=1, SizeY_mm=0.5, SizeZ_mm=0.6, Supplier 1=Mouser, TaMax_C=125°C, TaMin_C=-55°C, Technology=Ceramic, U/M=EA
C95 C113 C131: library part CMP-0008501-2, "CAP, CERM, 4700 pF, 100 V, +/- 10%, X7R, 1206", Cap_Case=1206, Manufacturer=AVX, Supplier Part Number 1=478-1521-1-ND, TempCo=X7R, Tolerance_%=10%, Value1="0.178 ohm", Value2=100V, ValueDisplayed=4700pF, AEC Category=Q200, AEC Grade=N/A, AEC Qualified=N, Cap_F=4.7nF, ComponentLink1Description="Datasheet link", ComponentLink1URL=http://datasheets.avx.com/X7RDielectric.pdf, CompType=Capacitor, ESR_ohm=1.78d, LatestRevisionDate=2017-03-09, MountType=SMT, PackageReference=1206, PartNumber=12061C472KAT2A, Polarized=N, Published=2008-06-19, Publisher="Texas Instruments", RoHS=Y, SizeArea_mm2=5.12, SizeAreaWB_mm2=10.92, SizeX_mm=3.2, SizeY_mm=1.6, SizeZ_mm=1.35, Supplier 1=Digi-Key, Supplier 2=Newark, Supplier 3=Mouser, Supplier Part Number 2=96M1479, Supplier Part Number 3=581-12061C472K, TaMax_C=125°C, TaMin_C=-55°C, Technology=Ceramic, U/M=EA
C133 C134 C136 C144 C146: library part CMP-0006950-5, "CAP, CERM, 4.7 uF, 6.3 V, +/- 10%, X5R, 0603", Cap_Case=0603, Manufacturer=Kemet, Supplier Part Number 1=399-3482-1-ND, TempCo=X5R, Tolerance_%=10%, Value1="0.006 ohm", Value2=6.3V, ValueDisplayed=4.7uF, AEC Category=Q200, AEC Qualified=?, Cap_F=4.7µF, ComponentLink1Description="Datasheet link", ComponentLink1URL=http://www.kemet.com/kemet/web/homepage/kechome.nsf/vapubfiles/F3102_Y5V.pdf/$file/F3102_Y5V.pdf, CompType=Capacitor, ESR_ohm=6m, IRMS_A=7.24A, LatestRevisionDate=2017-03-09, MountType=SMT, PackageReference=0603, PartNumber=C0603C475K9PACTU, Polarized=N, Published=2008-06-19, Publisher="Texas Instruments", RoHS=Y, SizeArea_mm2=1.28, SizeAreaWB_mm2=4.68, SizeX_mm=1.6, SizeY_mm=0.8, SizeZ_mm=1, Supplier 1=Digi-Key, Supplier 2=Mouser, Supplier 3=Farnell, Supplier Part Number 2=80-C0603C475K9P, Supplier Part Number 3=9227784, TaMax_C=85°C, TaMin_C=-55°C, Technology=Ceramic, U/M=EA
C135: library part CMP-0006203-2, "CAP, CERM, 0.01 uF, 10 V, +/- 10%, X7R, 0402", Cap_Case=0402, Manufacturer=AVX, Supplier Part Number 1=478-7890-1-ND, TempCo=X7R, Tolerance_%=10%, Value1=Unknown, Value2=10V, ValueDisplayed=0.01uF, AEC Category=Q200, AEC Grade=N/A, AEC Qualified=N, Cap_F=10nF, ComponentLink1Description="Datasheet link", ComponentLink1URL=http://datasheets.avx.com/X7RDielectric.pdf, CompType=Capacitor, LatestRevisionDate=2017-03-09, MountType=SMT, PackageReference=0402, PartNumber=0402ZC103KAT2A, Polarized=N, Published=2008-06-19, Publisher="Texas Instruments", RoHS=Y, SizeArea_mm2=0.5, SizeAreaWB_mm2=3, SizeX_mm=1, SizeY_mm=0.5, SizeZ_mm=0.6, Supplier 1=Digi-Key, Supplier 2=Newark, Supplier 3=Mouser, Supplier Part Number 2=94W2829, Supplier Part Number 3=581-0402ZC103KAT2A, TaMax_C=125°C, TaMin_C=-55°C, Technology=Ceramic, U/M=EA
C148: library part CMP-0006319-2, "CAP, CERM, 3300 pF, 50 V, +/- 10%, X7R, AEC-Q200 Grade 1, 0402", Cap_Case=0402, Manufacturer=TDK, Supplier Part Number 1=445-6891-1-ND, TempCo=X7R, Tolerance_%=10%, Value1="0.785178 ohm", Value2=50V, ValueDisplayed=3300pF, AEC Category=Q200, AEC Grade=1, AEC Qualified=Y, Cap_F=3.3nF, ComponentLink1Description="Datasheet link", ComponentLink1URL=https://product.tdk.com/en/search/capacitor/ceramic/mlcc/info?part_no=CGA2B2X7R1H332K050BA, CompType=Capacitor, ESR_ohm=7.85178d, IRMS_A=2.72902dA, LatestRevisionDate=2017-03-09, MountType=SMT, PackageReference=0402, PartNumber=CGA2B2X7R1H332K050BA, Polarized=N, Published=2008-06-19, Publisher="Texas Instruments", RoHS=Y, SizeArea_mm2=0.5, SizeAreaWB_mm2=3, SizeX_mm=1, SizeY_mm=0.5, SizeZ_mm=0.6, Supplier 1=Digi-Key, Supplier 2=Mouser, Supplier Part Number 2=810-CGA2B2X7R1H332K050BA, TaMax_C=125°C, TaMin_C=-55°C, Technology=Ceramic, U/M=EA
C149 C150: library part CMP-0750098-1, "CAP, CERM, 27 pF, 50 V,+/- 5%, C0G/NP0, 0402", Cap_Case=0402, Manufacturer=Kemet, TempCo=C0G/NP0, Tolerance_%=5%, Value2=50V, ValueDisplayed=27pF, AEC Category=Q200, AEC Grade=N/A, AEC Qualified=N, Cap_F=27pF, ComponentLink1Description="Datasheet link", ComponentLink1URL=https://content.kemet.com/datasheets/KEM_C1003_C0G_SMD.pdf, CompType=Capacitor, Green_EU RoHS=Passed, Green_EU RoHS-2=Passed, Green_Lifecycle=Active, Green_REACh=Passed, MountType=SMT, PackageReference=0402, PartNumber=C0402C270J5GACTU, Polarized=N, RoHS=Y, SizeArea_mm2=0.5, SizeAreaWB_mm2=3, SizeX_mm=1, SizeY_mm=0.5, SizeZ_mm=0.6, TaMax_C=125°C, TaMin_C=-55°C, Technology=Ceramic, U/M=EA
C160: library part CMP-0082066-1, "CAP, CERM, 10 pF, 3000 V,+/- 5%, C0G/NP0, AEC-Q200 Grade 1, 1812", Cap_Case=1812, Manufacturer=Kemet, Supplier Part Number 1=399-7113-1-ND, TempCo=C0G/NP0, Tolerance_%=5%, Value2=3000V, ValueDisplayed=10pF, AEC Category=Q200, AEC Grade=1, AEC Qualified=Y, Cap_F=10pF, ComponentLink1Description="Datasheet link", ComponentLink1URL=https://search.kemet.com/component-edge/download/datasheet/C1812C100JHGACTU.pdf, CompType=Capacitor, MountType=SMT, PackageReference=1812, PartNumber=C1812C100JHGACTU, Polarized=N, RoHS=Y, SizeArea_mm2=14.4, SizeAreaWB_mm2=23.1, SizeX_mm=4.5, SizeY_mm=3.2, SizeZ_mm=1.8, Supplier 1=Digi-Key, Supplier 2=Mouser, Supplier Part Number 2=80-C1812C100JHG, TaMax_C=125°C, TaMin_C=-55°C, Technology=Ceramic, U/M=EA
C161: library part CMP-001-00076-4, "Chip Capacitor, 4.7µF +/-20%, 10V, 0603, Thickness 1 mm", Case/Package=0603, Max Operating Temperature=85°C, Min Operating Temperature=-55°C, Tolerance=10%, Voltage Rating=10V, Mounting Technology=SMT, Pins=2
C162: library part CMP-001-00076-4, Case/Package=0603, Max Operating Temperature=85°C, Min Operating Temperature=-55°C, Tolerance=10%, Voltage Rating=10V, Mounting Technology=SMT, Pins=2
C163 C164 C165: library part CMP-001-00007-7, "Chip Capacitor, 1 uF, +/- 10%, 50 V, 0805 (2012 Metric)", Capacitor Type=Ceramic, Case/Package=0805, Max Operating Temperature=125°C, Min Operating Temperature=-55°C, Tolerance=10%, Voltage Rating=50V, Mounting Technology=SM, Pins=2, RoHS Compliant=True
C166 C167 C168 C169 C170 C171 C172 C173 C174 C175 C176 C177 C178 C179 C180 C181 C182 C183 C184 C185: library part CMP-001-00017-6, "Chip Capacitor, 100 nF, +/- 10%, 50 V, 0603 (1608 Metric)", Capacitor Type=Ceramic, Case/Package=0603, Max Operating Temperature=125°C, Min Operating Temperature=-55°C, Tolerance=10%, Voltage Rating=50V, Mounting Technology=SM, Pins=2, RoHS Compliant=True
D1: "Diode, Schottky, 10 V, 1 A, AEC-Q101, POWERMITE", Case/Package=POWERMITE, Manufacturer="ON Semiconductor", PartNumber=MBRM110ET1G, Value1=1A, Value2=0.53V, AEC Category=Q101, AEC Qualified=Y, Available Preview Images=2D, ComponentLink1Description="Datasheet link", ComponentLink1URL=http://www.onsemi.com/pub_link/Collateral/MBRM110E-D.PDF, CompType=Diode, Design Item ID=CMP-0028747-2, Green_EU RoHS=Incomplete, Green_EU RoHS-2=Incomplete, Green_Lifecycle="Not Set", Green_REACh=Incomplete, Io_A=1A, MountType=SMT, RoHS=Y, SizeArea_mm2=7.995, SizeAreaWB_mm2=14.945, SizeX_mm=3.9, SizeY_mm=2.05, SizeZ_mm=1.15, Source=MCU063B.SCHLIB, TJmax_C=150°C, Type=Schottky, Vf_V=530mV, Vr_V=10V
D2: library part CMP-004-00069-1, "SURFACE MOUNT SILICON LOW VF SCHOTTKY DIODE 0.5 AMP", Arrow Part Number="CFSH05-20L TR PBFREE", Manufacturer_Name="Central Semiconductor", Mouser Part Number=610-CFSH05-20LTR, Arrow Price/Stock=https://www.arrow.com/en/products/cfsh05-20ltrpbfree/central-semiconductor?region=nac, Datasheet Link=https://my.centralsemi.com/get_document.php?cmp=1&mergetype=pd&mergepath=pd&pdf_id=CFSH05-20L.PDF, Design Item ID=CFSH05-20L_TR_PBFREE, Height=0.4mm, Manufacturer_Part_Number="CFSH05-20L TR PBFREE", Mouser Price/Stock=https://www.mouser.co.uk/ProductDetail/Central-Semiconductor/CFSH05-20L-TR-PBFREE?qs=u16ybLDytRbLc8US0gUlgw%3D%3D, Source=SamacSys.SchLib
D3 D4 D5: library part CMP-0002951-3, "LED, Red, SMD", Color=Red, Manufacturer="Wurth Elektronik", Power_TotalModule=72mW, Value1=0.072W, Value2=1.9V, Angle=140, ComponentLink1Description="Datasheet link", ComponentLink1URL=http://katalog.we-online.de/led/datasheet/150080SS75000.pdf, CompType=LED, Io_A=30mA, Ir_A=25µA, MountType=SMT, PackageReference=LED_0805, PartNumber=150080SS75000, RoHS=Y, TJmax_C=85°C, Type=AlInGaP, Vf_V=1.9V, Vr_V=5V
D6 D8: library part CMP-0002960-2, "LED, Bright Green, SMD", Color="Bright Green", Manufacturer="Wurth Elektronik", Power_TotalModule=72mW, Supplier Part Number 1=732-4986-1-ND, Value1=0.072W, Value2=2V, Angle=140, ComponentLink1Description="Datasheet link", ComponentLink1URL=http://katalog.we-online.de/led/datasheet/150080VS75000.pdf, CompType=LED, Io_A=20mA, LatestRevisionDate=2017-03-09, MountType=SMT, PackageReference=LED_0805, PartNumber=150080VS75000, Published=2008-07-11, Publisher="Texas Instruments", RoHS=Y, Supplier 1=Digi-Key, Supplier 2=Newark, Supplier 3=Mouser, Supplier Part Number 2=95W3803, Supplier Part Number 3=710-150080VS75000, TJmax_C=85°C, Type=AlInGaP, U/M=EA, Vf_V=2V, Vr_V=5V
D7: library part CMP-0028747-2, "Diode, Schottky, 10 V, 1 A, AEC-Q101, POWERMITE", Manufacturer="ON Semiconductor", Value1=1A, Value2=0.53V, AEC Category=Q101, AEC Qualified=Y, ComponentLink1Description="Datasheet link", ComponentLink1URL=http://www.onsemi.com/pub_link/Collateral/MBRM110E-D.PDF, CompType=Diode, Green_EU RoHS=Incomplete, Green_EU RoHS-2=Incomplete, Green_Lifecycle="Not Set", Green_REACh=Incomplete, Io_A=1A, MountType=SMT, PackageReference=POWERMITE, PartNumber=MBRM110ET1G, RoHS=Y, SizeArea_mm2=7.995, SizeAreaWB_mm2=14.945, SizeX_mm=3.9, SizeY_mm=2.05, SizeZ_mm=1.15, TJmax_C=150°C, Type=Schottky, Vf_V=530mV, Vr_V=10V
D9 D10: library part CMP-0002959-3, "LED, Blue, SMD", Color=Blue, Manufacturer="Wurth Elektronik", Power_TotalModule=105mW, Value1=0.105W, Value2=3.2V, Angle=140, ComponentLink1Description="Datasheet link", ComponentLink1URL=http://katalog.we-online.de/led/datasheet/150080BS75000.pdf, CompType=LED, Io_A=20mA, MountType=SMT, PackageReference=LED_0805, PartNumber=150080BS75000, RoHS=Y, TJmax_C=85°C, Type=InGaN, Vf_V=3.2V, Vr_V=5V
J1 J2: library part CMP-002-00178-1, "Socket(male) 100 Positions, Dual Row, Vertical Receptacle. BergStak Lite 0.80mm, Board-to-Board Connector,", Case/Package=None, Check_prices=https://www.snapeda.com/parts/10144517-101802LF/Amphenol/view-part/?ref=eda, Design Item ID=10144517-101802LF, MF="AMPHENOL ICC / FCI", MP=10144517-101802LF, SnapEDA_Link=https://www.snapeda.com/parts/10144517-101802LF/Amphenol/view-part/?ref=snap, Source=SamacSys.SchLib
J4: library part CMP-002-00071-1, "Board Connector, 2 Contact(s), 1 Row(s), Male, Straight, 0.1 inch Pitch, Solder Terminal, Friction Lock, Natural Insulator", Max Operating Temperature=105°C, Min Operating Temperature=-55°C, Connector Type="BOARD CONNECTOR", Mounting Technology=Board, RoHS Compliant=Yes
J5 J6 J7: library part CMP-0086350-1, "Connector, RJ45, 1x1, Gold, R/A, SMT", Manufacturer="Wurth Elektronik", ComponentLink1Description="Datasheet URL", ComponentLink1URL=https://sps16.itg.ti.com/sites/KMS/crossdivteams/altium/docs/ComponentDatasheets/7498010210A.pdf, CompType=RJ45, ContactFinish=Gold, Gender=Female, MountType=SMT, Orientation=R/A, PackageReference="Connector, RJ45, 1x1, Gold, R/A, SMT", PartNumber=7498010210A, PinCount=12, RoHS=Y, Row_Count=1
J8: library part CMP-0054809-1, "Connector, Receptacle, USB Mini B 2.0, SMT", Color=Black, Current_A=1A, Manufacturer="Wurth Elektronik", Supplier Part Number 1=732-2109-1-ND, Voltage_V=30V, Cert_CULUS=Y, Cert_UL=Y, CNHeader=FALSE, ComponentLink1Description="Datasheet URL", ComponentLink1URL=http://katalog.we-online.de/em/datasheet/65100516121.pdf, CompType=USB, ContactFinish=Gold, CT=TRUE, Gender=Female, Green_EU RoHS=Passed, Green_EU RoHS-2=Incomplete, Green_Lifecycle=Active, Green_REACh=Passed, LatestRevisionDate=26/05/2017, MountType=SMT, Orientation=R/A, PackageReference="Connector, Receptacle, USB Mini B 2.0, 5 Position, SMT", PartNumber=65100516121, PinCount=5, Pitch_mm=0.8, Publisher="Texas Instruments", RoHS=Y, Row_Count=1, Supplier 1=Digi-Key, Supplier 2=Newark, Supplier 3=Mouser, Supplier Part Number 2=19P1304, Supplier Part Number 3=710-65100516121
J9 J10: library part CMP-002-00158-1, "10 Positions Header Connector 0.100\" (2.54mm) Through Hole Gold", Arrow Part Number=302-S101, Manufacturer_Name="On Shore Technology Inc.", Arrow Price/Stock=https://www.arrow.com/en/products/302-s101/on-shore-technology?utm_currency=USD&region=nac, Datasheet Link=https://www.digikey.com/product-detail/en/on-shore-technology-inc/302-S101/ED1543-ND/2178422, Design Item ID=302-S101, Height=9.05mm, Manufacturer_Part_Number=302-S101, Source=SamacSys.SchLib
J11: library part CMP-002-00182-1, "Connector Header Through Hole 14 position 0.100 (2.54mm)", Case/Package=None, Check_prices=https://www.snapeda.com/parts/SBH11-PBPC-D07-ST-BK/Sullins/view-part/?ref=eda, Design Item ID=SBH11-PBPC-D07-ST-BK, MF="Sullins Connector", MP=SBH11-PBPC-D07-ST-BK, SnapEDA_Link=https://www.snapeda.com/parts/SBH11-PBPC-D07-ST-BK/Sullins/view-part/?ref=snap, Source=SBH11-PBPC-D07-ST-BK.SchLib
L1 L2: library part CMP-006-00009-6, "Chip Inductor, 2.2 uH, +/- 20%, -55 to 125 degC, 1008 (2520 Metric), RoHS, Tape and Reel", Case/Package=1008, Current Rating=1.3A, Manufacturer=Murata, Max Operating Temperature=125°C, Min Operating Temperature=-55°C, Package Description="2-Pin Surface Mounted Device, Body 2.5 x 2 mm", Package Quantity=3000, Self Resonant Frequency=40MHz, Tolerance=20%, Core Material=Ferrite, Datasheet URL=http://psearch.en.murata.com/inductor/product/LQM2HPN2R2MG0%23.pdf, Datasheet Version=Aug-16, Mounting Technology=SM, Package Reference=1008, Packaging=TapeandReel, RoHS Compliant=True, Shielding=Shielded
L3 L4 L5: library part CMP-006-00004-3, "Chip Ferrite Bead for General Use, 120 Ohm, 500 mA, -55 to 125 degC, 0603 (1608 Metric), RoHS, Tape and Reel", Case/Package=0603, Current Rating=500mA, Manufacturer=Murata, Max Operating Temperature=125°C, Min Operating Temperature=-55°C, Package Quantity=4000, Package Reference=BLM18_H950-2, Resistance=200mohm, Tolerance=25%, Core Material=Ferrite, Datasheet URL=https://statics3.seeedstudio.com/images/opl/datasheet/303010016.pdf, Datasheet Version=Jun-12, Impedance=120Ohm, Max Current Rating=500mA, Packaging=TapeandReel, RoHS Compliant=True
L6 L7: library part CMP-0003398-1, "Ferrite Bead, 600 ohm @ 100 MHz, 0.5 A, 0805", Manufacturer="Laird-Signal Integrity Products", Supplier Part Number 1=240-2399-1-ND, Value1="0.3 ohm", Value2=0.5A, ValueDisplayed="600 ohm", ComponentLink1Description="Datasheet link", ComponentLink1URL=http://www.lairdtech.com/WorkArea/linkit.aspx?linkIdentifier=id&ItemID=4884, CompType="Ferrite Bead", DCR_ohm=3d, Imax_A=5dA, LatestRevisionDate=2017-03-09, MountType=SMT, PackageReference=0805, PartNumber=HZ0805E601R-10, Published=2014-04-30, Publisher="Texas Instruments", RoHS=Y, SizeArea_mm2=2.5, SizeAreaWB_mm2=6.75, SizeX_mm=2, SizeY_mm=1.25, SizeZ_mm=1.45, Supplier 1=Digi-Key, Supplier 2=Newark, Supplier 3=Mouser, Supplier Part Number 2=66W8909, Supplier Part Number 3=875-HZ0805E601R-10, ZTyp@100MHz_Ohm=600
LED1: library part CMP-007-00038-1, "WL-SMCW SMT Mono-Color Chip LED Waterclear 0805", Manufacturer_Name="Wurth Elektronik", Manufacturer_Part_Number=150080VS75000, Mouser Part Number=710-150080VS75000, Datasheet Link=https://www.we-online.com/components/products/download/Download_3D_150080VS75000+%28rev1%29.pdf, Design Item ID=150080VS75000, Height=0.7mm, Mouser Price/Stock=https://www.mouser.co.uk/ProductDetail/Wurth-Elektronik/150080VS75000?qs=LlUlMxKIyB0tGHJmO6%252B0ug%3D%3D, Source=SamacSys.SchLib
R3 R4 R5 R6 R7 R8 R59: library part CMP-0026916-3, "RES, 39, 5%, 0.063 W, AEC-Q200 Grade 0, 0402", Manufacturer=Vishay-Dale, Power_W=63mW, Supplier Part Number 1=541-39JCT-ND, TempCo="200 ppm/C", Tolerance_%=5%, Value2=0.063W, Value_Code=39R0, ValueDisplayed=39, AEC Category=Q200, AEC Grade=0, AEC Qualified=Y, ComponentLink1Description="Datasheet link", ComponentLink1URL=http://www.vishay.com/docs/20035/dcrcwe3.pdf, CompType=Resistor, EIA_Code=E24, MountType=SMT, PackageReference=0402, PartNumber=CRCW040239R0JNED, Res_ohm=39, RoHS=E, SizeArea_mm2=0.5, SizeX_mm=1, SizeY_mm=0.5, SizeZ_mm=0.6, Supplier 1=Digi-Key, Supplier 2=Newark, Supplier 3=Mouser, Supplier Part Number 2=89M6649, Supplier Part Number 3=71-CRCW0402J-39-E3, Technology="Thick Film", Value1=5%, VDC_V=50V
R9 R10 R11 R12 R13 R14 R15 R16 R17 R18 R19 R20 R21 R22 R23 R24 R25 R26 R27 R28 R29 R30 R31 R32 R33 R34 R35 R36 R41 R42 R72 R73 R76 R85: library part CMP-0025697-4, "RES, 0, 5%, 0.1 W, AEC-Q200 Grade 0, 0603", Manufacturer=Vishay-Dale, Power_W=100mW, Supplier Part Number 1=541-0.0GCT-ND, TempCo="200 ppm/C", Tolerance_%=5%, Value2=0.1W, Value_Code=0000, ValueDisplayed=0, AEC Category=Q200, AEC Grade=0, AEC Qualified=Y, ComponentLink1Description="Datasheet link", ComponentLink1URL=http://www.vishay.com/docs/20035/dcrcwe3.pdf, CompType=Resistor, EIA_Code=E24, MountType=SMT, PackageReference=0603, PartNumber=CRCW06030000Z0EA, Res_ohm=0, RoHS=E, SizeArea_mm2=1.28, SizeX_mm=1.6, SizeY_mm=0.8, SizeZ_mm=1, Supplier 1=Digi-Key, Supplier 2=Newark, Supplier 3=Mouser, Supplier Part Number 2=52K8014, Supplier Part Number 3=71-CRCW0603-0-E3, Technology="Thick Film", Value1=5%, VDC_V=75V
R37 R38 R39 R40: library part CMP-0078660-1, "RES, 0.1, 1%, 0.25 W, 0402", Manufacturer=Panasonic, Power_W=250mW, Supplier Part Number 1=P17368CT-ND, TempCo="300 ppm/C", Tolerance_%=1%, Value2=0.25W, Value_Code=R100, ValueDisplayed=0.1, AEC Category=Q200, AEC Grade=N/A, AEC Qualified=N, ComponentLink1Description="Datasheet link", ComponentLink1URL=https://industrial.panasonic.com/cdbs/www-data/pdf/RDN0000/AOA0000C313.pdf, CompType=Resistor, EIA_Code=E96, MountType=SMT, PackageReference=0402, PartNumber=ERJ2BWFR100X, Res_ohm=1d, RoHS=Y, SizeArea_mm2=0.5, SizeX_mm=1, SizeY_mm=0.5, SizeZ_mm=0.6, Supplier 1=Digi-Key, Supplier 2=Mouser, Supplier Part Number 2=667-ERJ-2BWFR100X, Technology="Thick Film", Value1=1%
R43: library part CMP-0022895-5, "RES, 1.00 k, 1%, 0.1 W, 0603", Manufacturer=Yageo, Power_W=100mW, Supplier Part Number 1=311-1.00KHRCT-ND, TempCo="100 ppm/C", Tolerance_%=1%, Value2=0.1W, Value_Code=1k00, ValueDisplayed=1.00k, AEC Category=Q200, AEC Grade=N/A, AEC Qualified=N, ComponentLink1Description="Datasheet link", ComponentLink1URL=http://www.yageo.com/pdf/Pu-RC0603_51_PbFree_L_2.pdf, CompType=Resistor, EIA_Code=E96, MountType=SMT, PackageReference=0603, PartNumber=RC0603FR-071KL, Res_ohm=1k, RoHS=Y, SizeArea_mm2=1.28, SizeAreaWB_mm2=4.68, SizeX_mm=1.6, SizeY_mm=0.8, SizeZ_mm=1, Supplier 1=Digi-Key, Supplier 2=Mouser, Supplier 3=Farnell, Supplier Part Number 2=603-RC0603FR-071KL, Supplier Part Number 3=9238484, Technology="Thick Film", Value1=1%, VDC_V=75V
R44: library part CMP-009-00005-5, "Chip Resistor, 0 Ohm, 0.1 W, -55 to 155 degC, 0402 (1005 Metric)", Case/Package=0402, Max Operating Temperature=155°C, Min Operating Temperature=-55°C, Power=100mW, Tolerance=5%, Voltage Rating=50V, Mounting Technology=SM, Pins=2, RoHS Compliant=True
R45: library part CMP-009-00081-2, "22K 0.063W 1% 0402 (1005 Metric)  SMD", Case/Package=0402, Power=63mW, Tolerance=1%, Mounting Technology=SMT, Pins=2
R46 R163 R164 R165 R166 R167 R168 R169: library part CMP-009-00006-5, "Chip Resistor, 0 Ohm, 0.1 W, -55 to 155 degC, 0603 (1608 Metric)", Case/Package=0603, Max Operating Temperature=155°C, Min Operating Temperature=-55°C, Power=100mW, Tolerance=5%, Voltage Rating=50V, Mounting Technology=SM, Pins=2, RoHS Compliant=True
R47: library part CMP-0026962-3, "RES, 680, 5%, 0.063 W, AEC-Q200 Grade 0, 0402", Manufacturer=Vishay-Dale, Power_W=63mW, Supplier Part Number 1=541-680JCT-ND, TempCo="200 ppm/C", Tolerance_%=5%, Value2=0.063W, Value_Code=680R, ValueDisplayed=680/R0402, AEC Category=Q200, AEC Grade=0, AEC Qualified=Y, ComponentLink1Description="Datasheet link", ComponentLink1URL=http://www.vishay.com/docs/20035/dcrcwe3.pdf, CompType=Resistor, EIA_Code=E24, MountType=SMT, PackageReference=0402, PartNumber=CRCW0402680RJNED, Res_ohm=680, RoHS=E, SizeArea_mm2=0.5, SizeX_mm=1, SizeY_mm=0.5, SizeZ_mm=0.6, Supplier 1=Digi-Key, Supplier 2=Newark, Supplier 3=Mouser, Supplier Part Number 2=59M6744, Supplier Part Number 3=71-CRCW0402J-680-E3, Technology="Thick Film", Value1=5%, VDC_V=50V
R48: library part CMP-0026300-2, "RES, 340 k, 1%, 0.063 W, AEC-Q200 Grade 0, 0402", Manufacturer=Vishay-Dale, Power_W=63mW, Supplier Part Number 1=541-340KLCT-ND, TempCo="100 ppm/C", Tolerance_%=1%, Value2=0.063W, Value_Code=340k, ValueDisplayed=340k/R0402, AEC Category=Q200, AEC Grade=0, AEC Qualified=Y, ComponentLink1Description="Datasheet link", ComponentLink1URL=http://www.vishay.com/docs/20035/dcrcwe3.pdf, CompType=Resistor, EIA_Code=E96, MountType=SMT, PackageReference=0402, PartNumber=CRCW0402340KFKED, Res_ohm=340k, RoHS=E, SizeArea_mm2=0.5, SizeX_mm=1, SizeY_mm=0.5, SizeZ_mm=0.6, Supplier 1=Digi-Key, Supplier 2=Newark, Supplier 3=Mouser, Supplier Part Number 2=52K6992, Supplier Part Number 3=71-CRCW0402-340K-E3, Technology="Thick Film", Value1=1%, VDC_V=50V
R49: library part CMP-0026676-1, "RES, 2.00 k, 1%, 0.1 W, AEC-Q200 Grade 0, 0402", Manufacturer=Panasonic, Power_W=100mW, Supplier Part Number 1=P2.00KLCT-ND, TempCo="100 ppm/C", Tolerance_%=1%, Value2=0.1W, Value_Code=2k00, ValueDisplayed=2.00k/R0402, AEC Category=Q200, AEC Grade=0, AEC Qualified=Y, ComponentLink1Description="Datasheet link", ComponentLink1URL=http://industrial.panasonic.com/cdbs/www-data/pdf/RDA0000/AOA0000C86.pdf, CompType=Resistor, EIA_Code=E96, LatestRevisionDate=2017-03-09, MountType=SMT, PackageReference=0402, PartNumber=ERJ-2RKF2001X, Published=2008-06-26, Publisher="Texas Instruments", Res_ohm=2k, RoHS=Y, SizeArea_mm2=0.5, SizeX_mm=1, SizeY_mm=0.5, SizeZ_mm=0.6, Supplier 1=Digi-Key, Supplier 2=Newark, Supplier 3=Mouser, Supplier Part Number 2=73T6486, Supplier Part Number 3=667-ERJ-2RKF2001X, Technology="Thick Film", U/M=EA, Value1=1%, VDC_V=50V
R50: library part CMP-0026160-2, "RES, 205 k, 1%, 0.063 W, AEC-Q200 Grade 0, 0402", Manufacturer=Vishay-Dale, Power_W=63mW, Supplier Part Number 1=541-205KLCT-ND, TempCo="100 ppm/C", Tolerance_%=1%, Value2=0.063W, Value_Code=205k, ValueDisplayed=205k/R0402, AEC Category=Q200, AEC Grade=0, AEC Qualified=Y, ComponentLink1Description="Datasheet link", ComponentLink1URL=http://www.vishay.com/docs/20035/dcrcwe3.pdf, CompType=Resistor, EIA_Code=E96, MountType=SMT, PackageReference=0402, PartNumber=CRCW0402205KFKED, Res_ohm=205k, RoHS=E, SizeArea_mm2=0.5, SizeX_mm=1, SizeY_mm=0.5, SizeZ_mm=0.6, Supplier 1=Digi-Key, Supplier 2=Newark, Supplier 3=Mouser, Supplier Part Number 2=52K6827, Supplier Part Number 3=71-CRCW0402-205K-E3, Technology="Thick Film", Value1=1%, VDC_V=50V
R51: library part CMP-009-00066-2, "10K 0.063W 1% 0402 (1005 Metric)  SMD", Case/Package=0402, Power=63mW, Tolerance=1%, Mounting Technology=SMT, Pins=2
R52: library part CMP-009-00023-5, "Chip Resistor, 100 KOhm, +/- 1%, 0.1 W, -55 to 155 degC, 0603 (1608 Metric)", Case/Package=0603, Max Operating Temperature=155°C, Min Operating Temperature=-55°C, Power=100mW, Tolerance=1%, Voltage Rating=50V, Mounting Technology=SM, Pins=2, RoHS Compliant=True
R53: library part CMP-009-00163-3, "Chip Resistor, 200 kOhms, +/-1 %, 63 mW, -55 to 155 degC, 0402", Case/Package=0402, Max Operating Temperature=155°C, Min Operating Temperature=-55°C, Power=63mW, Tolerance=1%, Pins=2
R54: library part CMP-0025557-3, "RES, 75.0 k, 0.5%, 0.1 W, 0603", Manufacturer="Yageo America", Power_W=100mW, TempCo="50 ppm/C", Tolerance_%=0.5%, Value2=0.1W, Value_Code=75k0, ValueDisplayed=75.0k/R0603, AEC Category=Q200, AEC Qualified=?, ComponentLink1Description="Datasheet link", ComponentLink1URL=http://www.yageo.com/pdf/PYu-RT_1-to-0.05_RoHS_L_3.pdf, CompType=Resistor, EIA_Code=E192, LatestRevisionDate=2017-03-09, MountType=SMT, PackageReference=0603, PartNumber=RT0603DRE0775KL, Published=2008-06-26, Publisher="Texas Instruments", Res_ohm=75k, RoHS=Y, SizeArea_mm2=1.28, SizeX_mm=1.6, SizeY_mm=0.8, SizeZ_mm=1, Technology="Thin Film", U/M=EA, Value1=0.5%, VDC_V=75V
R55: library part CMP-0026950-3, "RES, 56, 5%, 0.063 W, AEC-Q200 Grade 0, 0402", Manufacturer=Vishay-Dale, Power_W=63mW, Supplier Part Number 1=541-56JCT-ND, TempCo="200 ppm/C", Tolerance_%=5%, Value2=0.063W, Value_Code=56R0, ValueDisplayed=56, AEC Category=Q200, AEC Grade=0, AEC Qualified=Y, ComponentLink1Description="Datasheet link", ComponentLink1URL=http://www.vishay.com/docs/20035/dcrcwe3.pdf, CompType=Resistor, EIA_Code=E24, MountType=SMT, PackageReference=0402, PartNumber=CRCW040256R0JNED, Res_ohm=56, RoHS=E, SizeArea_mm2=0.5, SizeX_mm=1, SizeY_mm=0.5, SizeZ_mm=0.6, Supplier 1=Digi-Key, Supplier 2=Newark, Supplier 3=Mouser, Supplier Part Number 2=89M6681, Supplier Part Number 3=71-CRCW0402J-56-E3, Technology="Thick Film", Value1=5%, VDC_V=50V
R62 R63 R68 R71 R79 R80 R92 R95 R107 R117 R132 R140 R150: library part CMP-0026890-5, "RES, 2.2 k, 5%, 0.063 W, AEC-Q200 Grade 0, 0402", Manufacturer=Vishay-Dale, Power_W=63mW, Supplier Part Number 1=541-2.2KJCT-ND, TempCo="200 ppm/C", Tolerance_%=5%, Value2=0.063W, Value_Code=2k20, ValueDisplayed=2.2k, AEC Category=Q200, AEC Grade=0, AEC Qualified=Y, ComponentLink1Description="Datasheet link", ComponentLink1URL=http://www.vishay.com/docs/20035/dcrcwe3.pdf, CompType=Resistor, EIA_Code=E24, MountType=SMT, PackageReference=0402, PartNumber=CRCW04022K20JNED, Res_ohm=2.2k, RoHS=E, SizeArea_mm2=0.5, SizeX_mm=1, SizeY_mm=0.5, SizeZ_mm=0.6, Supplier 1=Digi-Key, Supplier 2=Newark, Supplier 3=Mouser, Supplier Part Number 2=59M6710, Supplier Part Number 3=71-CRCW0402J-2.2K-E3, Technology="Thick Film", Value1=5%, VDC_V=50V
R64 R93 R108 R131: library part CMP-0078669-1, "RES, 10.0 k, 1%, 0.063 W, 0402", Manufacturer="Yageo America", Power_W=63mW, Supplier Part Number 1=311-10.0KLRCT-ND, TempCo="100 ppm/C", Tolerance_%=1%, Value2=0.063W, Value_Code=10k0, ValueDisplayed=10.0k, AEC Category=Q200, AEC Grade=N/A, AEC Qualified=N, ComponentLink1Description="Datasheet link", ComponentLink1URL=http://www.yageo.com/documents/recent/PYu-RC_Group_51_RoHS_L_8.pdf, CompType=Resistor, EIA_Code=E96, Green_EU RoHS="Passed with Exemption", Green_EU RoHS-2=Passed, Green_Lifecycle=Active, Green_REACh=Passed, MountType=SMT, PackageReference=0402, PartNumber=RC0402FR-0710KL, Res_ohm=10k, RoHS=Y, SizeArea_mm2=0.5, SizeX_mm=1, SizeY_mm=0.5, SizeZ_mm=0.6, Supplier 1=Digi-Key, Supplier 2=Newark, Supplier 3=Mouser, Supplier Part Number 2=98K7499, Supplier Part Number 3=603-RC0402FR-0710KL, Technology="Thick Film", Value1=1%
R66 R67 R122 R142: library part CMP-0026962-3, "RES, 680, 5%, 0.063 W, AEC-Q200 Grade 0, 0402", Manufacturer=Vishay-Dale, Power_W=63mW, Supplier Part Number 1=541-680JCT-ND, TempCo="200 ppm/C", Tolerance_%=5%, Value2=0.063W, Value_Code=680R, ValueDisplayed=680, AEC Category=Q200, AEC Grade=0, AEC Qualified=Y, ComponentLink1Description="Datasheet link", ComponentLink1URL=http://www.vishay.com/docs/20035/dcrcwe3.pdf, CompType=Resistor, EIA_Code=E24, MountType=SMT, PackageReference=0402, PartNumber=CRCW0402680RJNED, Res_ohm=680, RoHS=E, SizeArea_mm2=0.5, SizeX_mm=1, SizeY_mm=0.5, SizeZ_mm=0.6, Supplier 1=Digi-Key, Supplier 2=Newark, Supplier 3=Mouser, Supplier Part Number 2=59M6744, Supplier Part Number 3=71-CRCW0402J-680-E3, Technology="Thick Film", Value1=5%, VDC_V=50V
R69 R70 R123 R124: library part CMP-0026863-2, "RES, 1.5 M, 5%, 0.063 W, AEC-Q200 Grade 0, 0402", Manufacturer=Vishay-Dale, Power_W=63mW, Supplier Part Number 1=541-1.5MJCT-ND, TempCo="200 ppm/C", Tolerance_%=5%, Value2=0.063W, Value_Code=1M50, ValueDisplayed=1.5M, AEC Category=Q200, AEC Grade=0, AEC Qualified=Y, ComponentLink1Description="Datasheet link", ComponentLink1URL=http://www.vishay.com/docs/20035/dcrcwe3.pdf, CompType=Resistor, EIA_Code=E24, MountType=SMT, PackageReference=0402, PartNumber=CRCW04021M50JNED, Res_ohm=1.5M, RoHS=E, SizeArea_mm2=0.5, SizeX_mm=1, SizeY_mm=0.5, SizeZ_mm=0.6, Supplier 1=Digi-Key, Supplier 2=Mouser, Supplier Part Number 2=71-CRCW04021M50JNED, Technology="Thick Film", Value1=5%, VDC_V=50V
R74 R75: library part CMP-0026949-3, "RES, 56 k, 5%, 0.063 W, AEC-Q200 Grade 0, 0402", Manufacturer=Vishay-Dale, Power_W=63mW, Supplier Part Number 1=541-56KJCT-ND, TempCo="200 ppm/C", Tolerance_%=5%, Value2=0.063W, Value_Code=56k0, ValueDisplayed=56k, AEC Category=Q200, AEC Grade=0, AEC Qualified=Y, ComponentLink1Description="Datasheet link", ComponentLink1URL=http://www.vishay.com/docs/20035/dcrcwe3.pdf, CompType=Resistor, EIA_Code=E24, MountType=SMT, PackageReference=0402, PartNumber=CRCW040256K0JNED, Res_ohm=56k, RoHS=E, SizeArea_mm2=0.5, SizeX_mm=1, SizeY_mm=0.5, SizeZ_mm=0.6, Supplier 1=Digi-Key, Supplier 2=Newark, Supplier 3=Mouser, Supplier Part Number 2=89M6680, Supplier Part Number 3=71-CRCW0402J-56K-E3, Technology="Thick Film", Value1=5%, VDC_V=50V